# Altium PCB PCB_2019-12-31 00_37_03.pcbdoc
Units mil, origin at the board's own origin, x right, y up, seen from the top; angles counter-clockwise.
Board outline 5600 x 5600 mil, 2 copper layers (Top Layer, Bottom Layer); 48 components, 11 nets, 115 pads, 10 vias.
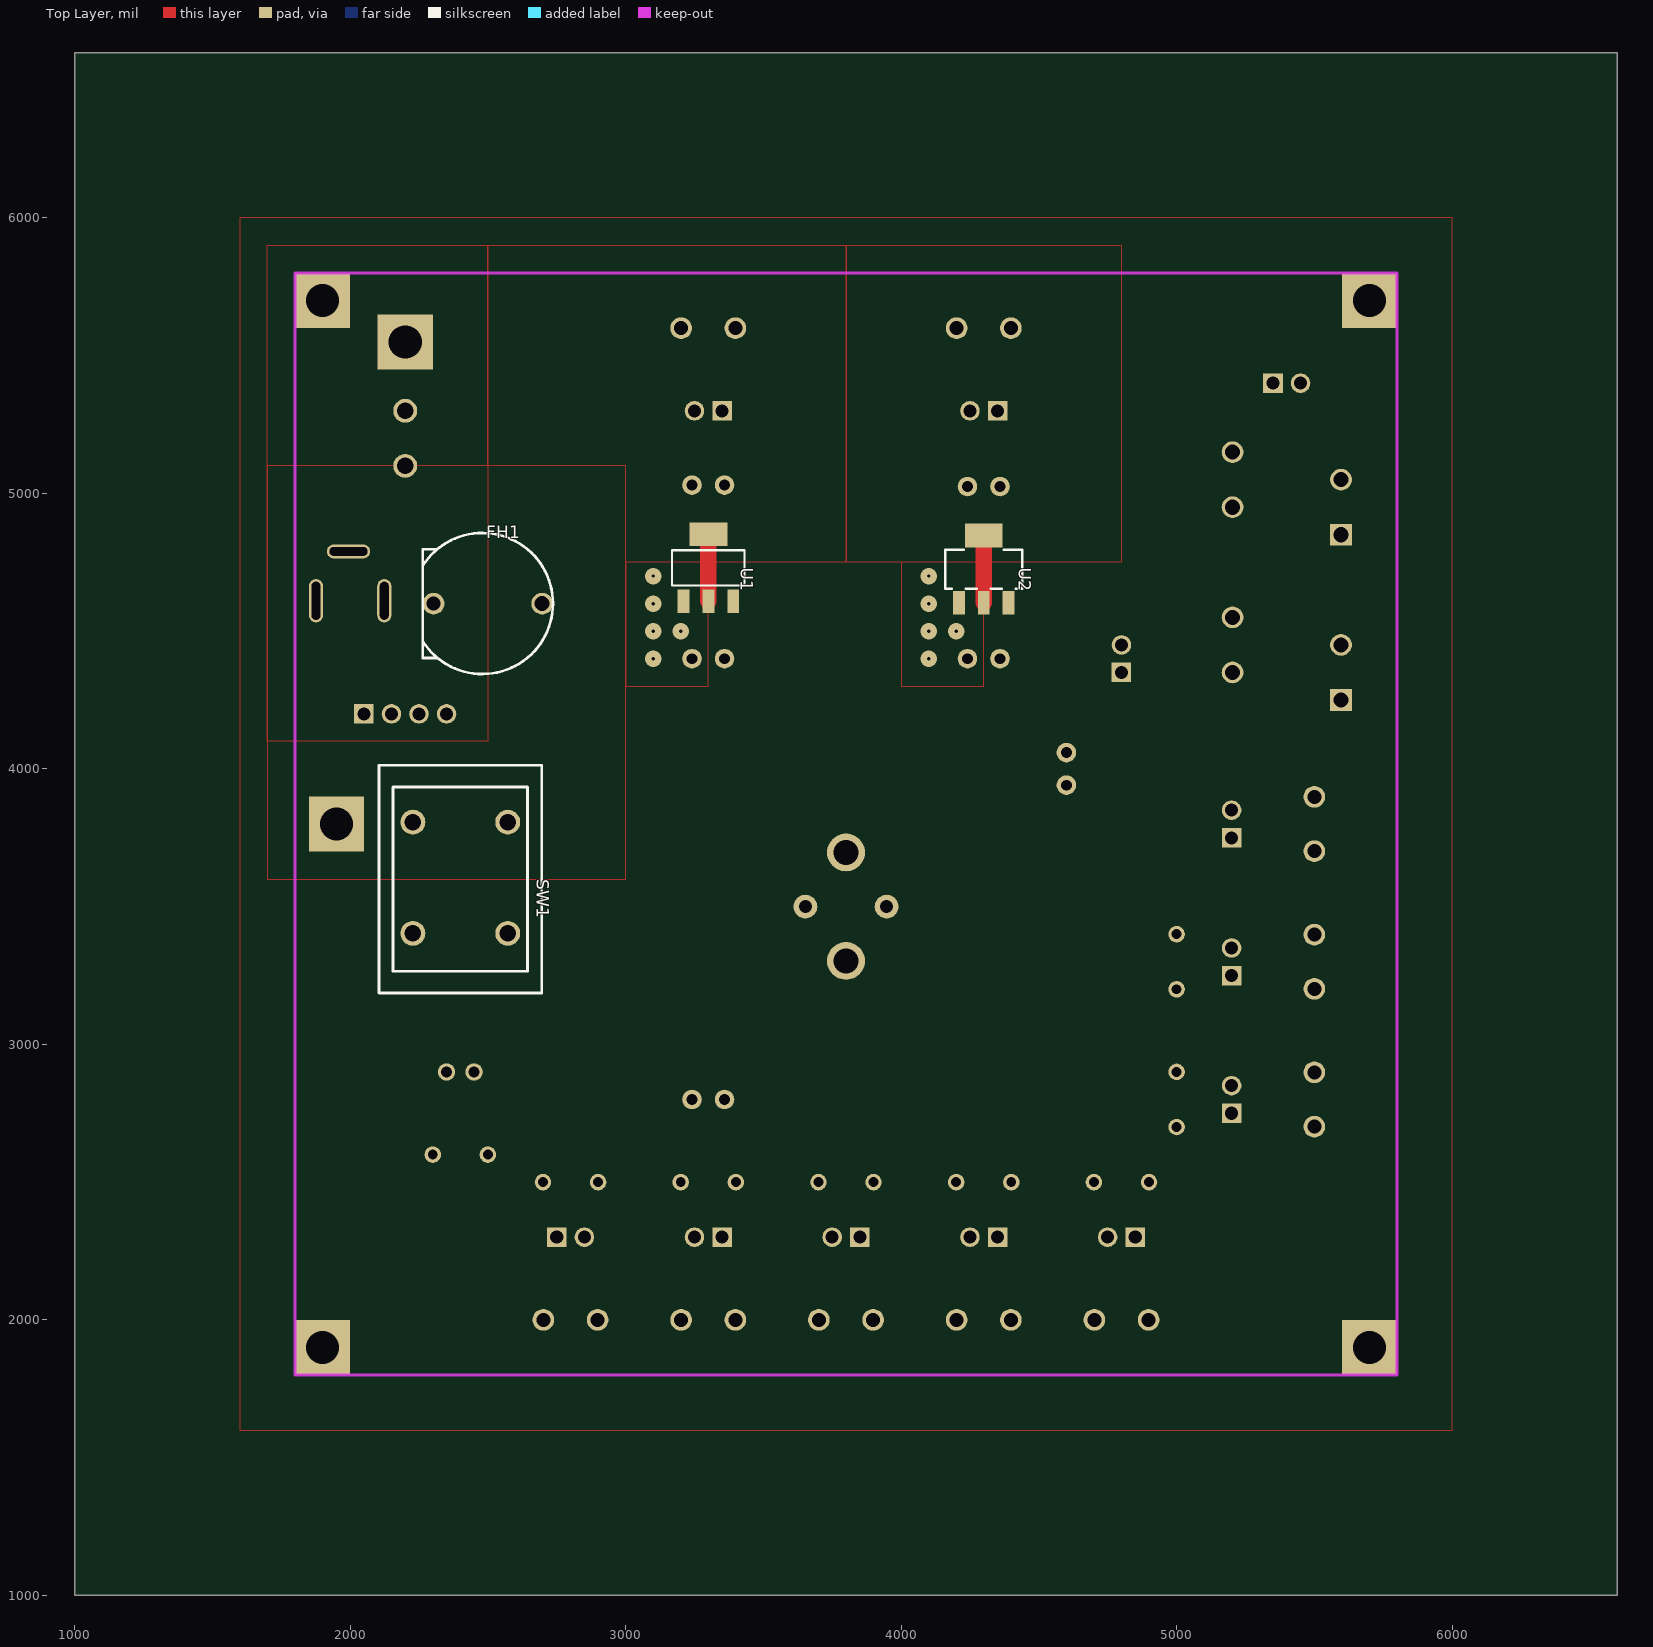
[diagram p0: Top Layer view]
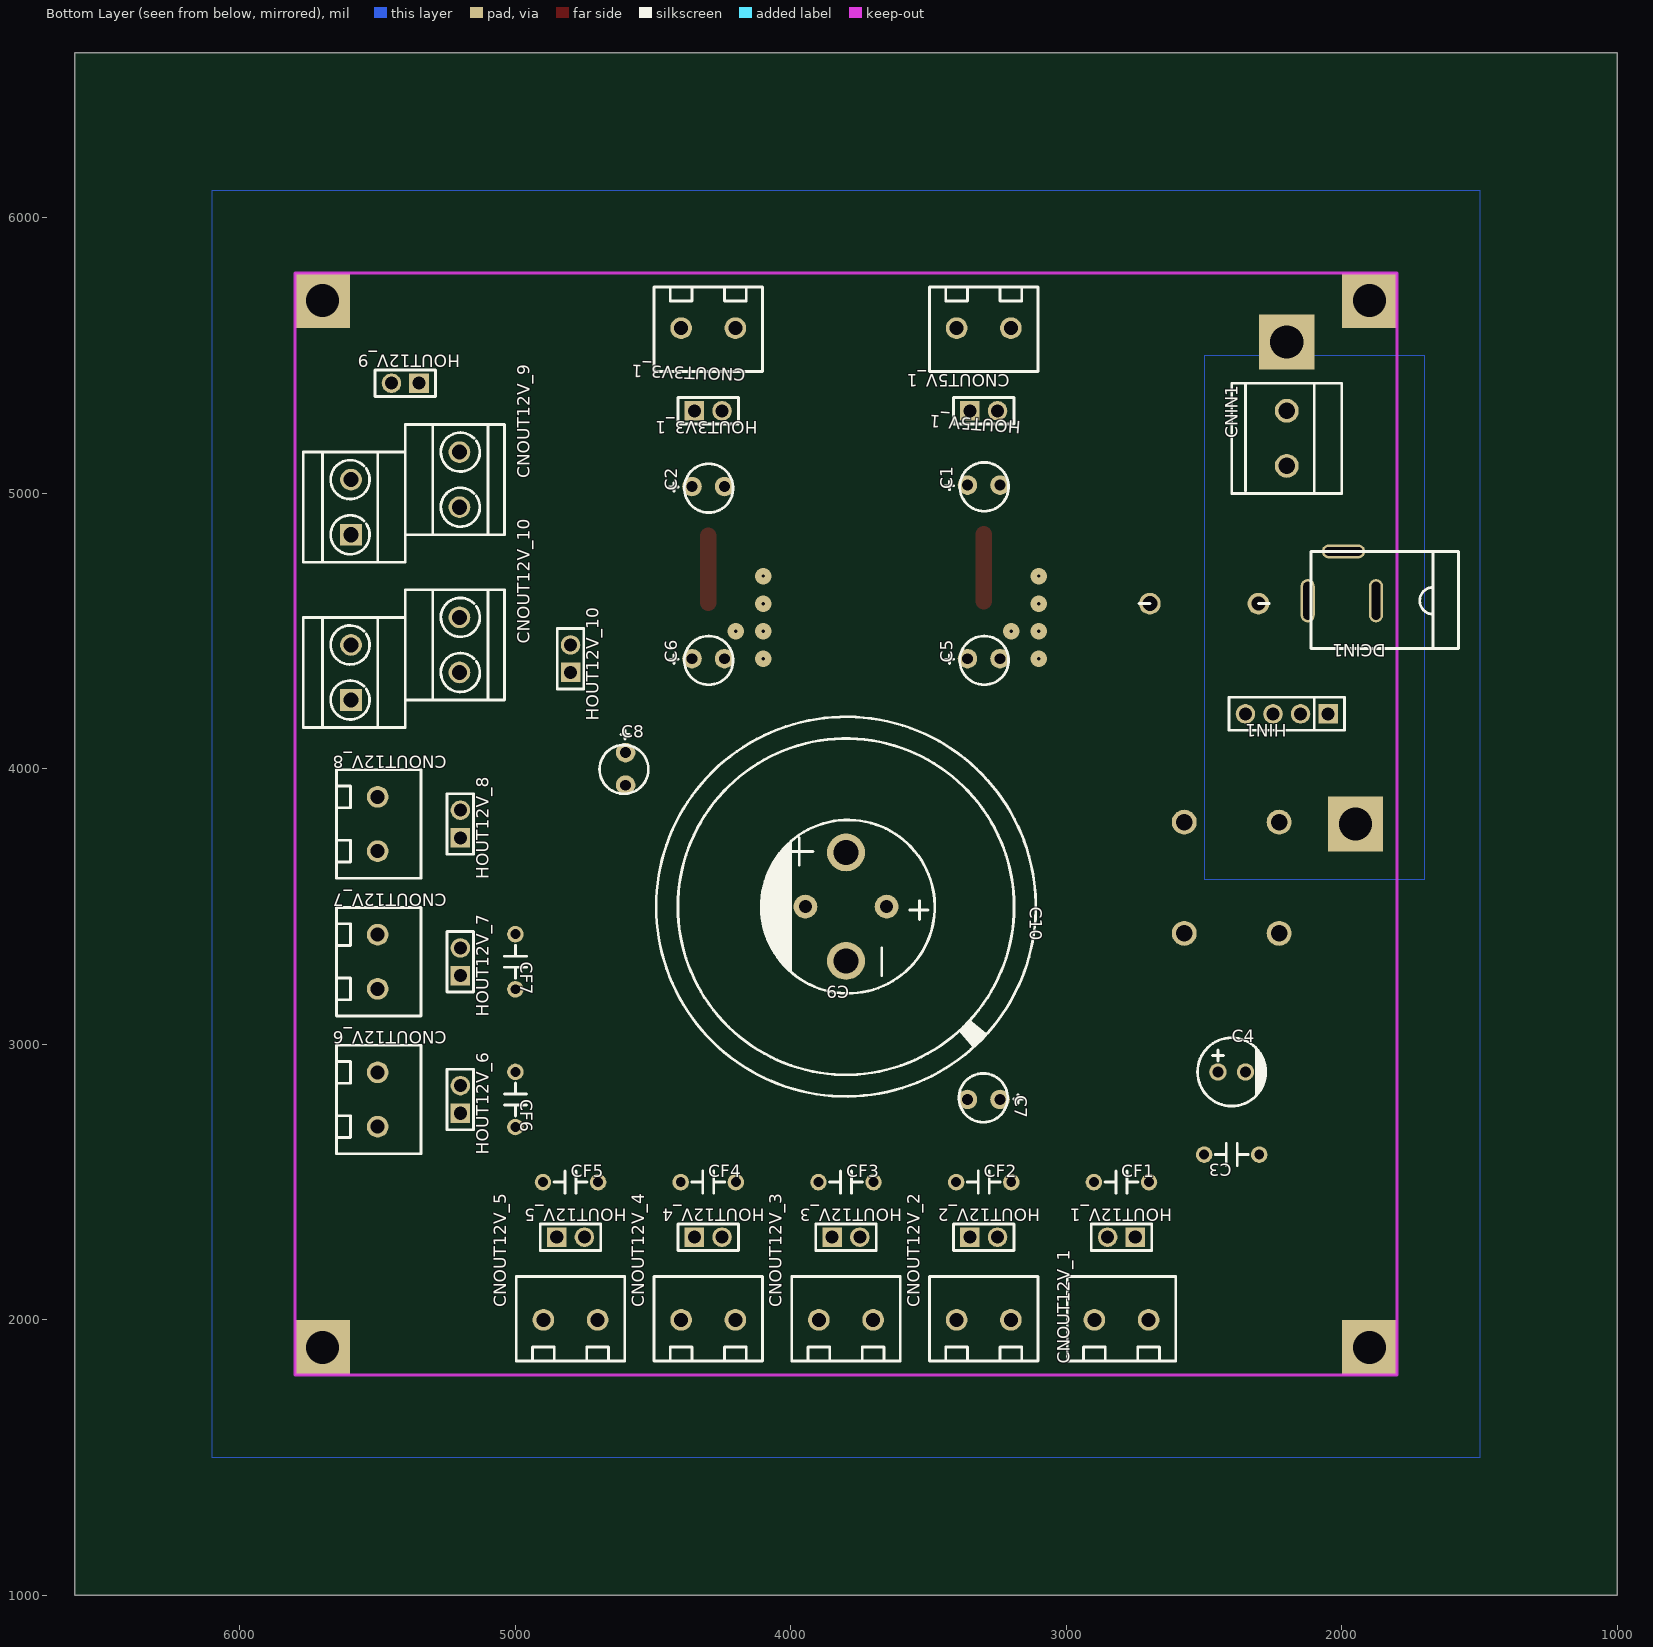
[diagram p1: Bottom Layer view, seen from below]

## Layer stack, top to bottom
Top Layer: signal copper (thickness not stored)
Dielectric: dielectric 12.6, FR-4, Dk 4.8
Bottom Layer: signal copper (thickness not stored)

## Board outline
6600,1000 1000,1000 1000,6600 6600,6600

## Components (designator, comment, footprint, x,y, rotation, side; value= is the part's Value field where it differs from the comment)
C1 "10uF" CAP-TAN-S2.5 3300,5030 r270 bottom
C2 "10uF" CAP-TAN-S2.5 4300,5025 r270 bottom
C3 "2.2uF" CAP-0.2 2400,2600 r180 bottom
C4 "100uF" CAP-TH_BD6.3-P2.50-D1.0-FD 2400,2900 r0 bottom
C5 "10uF" CAP-TAN-S2.5 3300,4400 r270 bottom
C6 "10uF" CAP-TAN-S2.5 4300,4400 r270 bottom
C7 "10uF" CAP-TAN-S2.5 3300,2800 r90 bottom
C8 "10uF" CAP-TAN-S2.5 4600,4000 r0 bottom
C9 "4700uF" CAP-TH_BD16.0-P7.50-D1.2-FD 3800,3500 r180 bottom
C10 "22000uF" CAP-TH_BD35.0-P10.00-D2.3-FD 3800,3500 r90 bottom
CF1 "1uF" CAP-0.2 2800,2500 r0 bottom
CF2 "1uF" CAP-0.2 3300,2500 r0 bottom
CF3 "1uF" CAP-0.2 3800,2500 r0 bottom
CF4 "1uF" CAP-0.2 4300,2500 r0 bottom
CF5 "1uF" CAP-0.2 4800,2500 r0 bottom
CF6 "1uF" CAP-0.2 5000,2800 r90 bottom
CF7 "1uF" CAP-0.2 5000,3300 r90 bottom
CNIN1 "MKDSN1.5/2-5.08" MKDSN1.5/2-5.08 2200,5200 r270 bottom
CNOUT3V3_1 "WJ126V-5.0-2P" WJ126V-5.0-2P 4300,5600 r90 bottom
CNOUT5V_1 "WJ126V-5.0-2P" WJ126V-5.0-2P 3300,5600 r90 bottom
CNOUT12V_1 "WJ126V-5.0-2P" WJ126V-5.0-2P 2800,2000 r270 bottom
CNOUT12V_2 "WJ126V-5.0-2P" WJ126V-5.0-2P 3300,2000 r270 bottom
CNOUT12V_3 "WJ126V-5.0-2P" WJ126V-5.0-2P 3800,2000 r270 bottom
CNOUT12V_4 "WJ126V-5.0-2P" WJ126V-5.0-2P 4300,2000 r270 bottom
CNOUT12V_5 "WJ126V-5.0-2P" WJ126V-5.0-2P 4800,2000 r270 bottom
CNOUT12V_6 "WJ126V-5.0-2P" WJ126V-5.0-2P 5500,2800 r0 bottom
CNOUT12V_7 "WJ126V-5.0-2P" WJ126V-5.0-2P 5500,3300 r0 bottom
CNOUT12V_8 "WJ126V-5.0-2P" WJ126V-5.0-2P 5500,3800 r0 bottom
CNOUT12V_9 "EELK508V-04P" EELK508V-04P 5400,5000 r270 bottom
CNOUT12V_10 "EELK508V-04P" EELK508V-04P 5400,4400 r270 bottom
DCIN1 "DC005-2.0MM" DC-5020 2000,4700 r180 bottom
FH1 "Fuse-holder - C268208" "FUSE-HOLDER- C268208" 2500,4600 r0 top
HIN1 "Header-Male-2.54_1x4" DIP-1X4P-2.54MM-M 2200,4200 r180 bottom
HOUT3V3_1 "MTP125-1102S1" HDR-TH_2P-P2.54-V_A2541HWV-2P 4300,5300 r0 bottom
HOUT5V_1 "MTP125-1102S1" HDR-TH_2P-P2.54-V_A2541HWV-2P 3300,5300 r0 bottom
HOUT12V_1 "MTP125-1102S1" HDR-TH_2P-P2.54-V_A2541HWV-2P 2800,2300 r180 bottom
HOUT12V_2 "MTP125-1102S1" HDR-TH_2P-P2.54-V_A2541HWV-2P 3300,2300 r0 bottom
HOUT12V_3 "MTP125-1102S1" HDR-TH_2P-P2.54-V_A2541HWV-2P 3800,2300 r0 bottom
HOUT12V_4 "MTP125-1102S1" HDR-TH_2P-P2.54-V_A2541HWV-2P 4300,2300 r0 bottom
HOUT12V_5 "MTP125-1102S1" HDR-TH_2P-P2.54-V_A2541HWV-2P 4800,2300 r0 bottom
HOUT12V_6 "MTP125-1102S1" HDR-TH_2P-P2.54-V_A2541HWV-2P 5200,2800 r270 bottom
HOUT12V_7 "MTP125-1102S1" HDR-TH_2P-P2.54-V_A2541HWV-2P 5200,3300 r270 bottom
HOUT12V_8 "MTP125-1102S1" HDR-TH_2P-P2.54-V_A2541HWV-2P 5200,3800 r270 bottom
HOUT12V_9 "MTP125-1102S1" HDR-TH_2P-P2.54-V_A2541HWV-2P 5400,5400 r180 bottom
HOUT12V_10 "MTP125-1102S1" HDR-TH_2P-P2.54-V_A2541HWV-2P 4800,4400 r270 bottom
SW1 "SDDJE33300" SW-TH_4PIN_SDDJE33300 2400,3600 r270 top
U1 "NCP1117ST50T3G" SOT-223_L6.5-W3.5-P2.30-LS7.0-BR 3300,4730 r270 top
U2 "NCP1117ST33T3G" SOT-223-3_L6.5-W3.4-P2.30-LS7.0-BR 4300,4725 r270 top

## Footprints (in the part's own frame and the unit in brackets; to place one, negate y for a bottom-side part, rotate by r counter-clockwise, add the part's x,y. Pads: shape width x height; smd on the part's side, far side on the other; paste and mask are expansions set on the pad)
CAP-0.2 [mil]
  round 60 hole 36: 1(100,0) 2(-100,0)
  silkscreen extent -60,-40 60,40
CAP-TAN-S2.5 [mm]
  round 1.8 hole 1: 1(0,-1.5) 2(0,1.5)
  silkscreen extent -2.1,-3.6 2.4,2.29
CAP-TH_BD6.3-P2.50-D1.0-FD [mm]
  round 1.6 hole 1: 1(1.27,0) 2(-1.27,0)
  silkscreen extent -3.17,-3.15 3.15,3.15
CAP-TH_BD16.0-P7.50-D1.2-FD [mm]
  round 2.2 hole 1.2: 1(3.75,0) 2(-3.75,0)
  silkscreen extent -7.81,-8 8.19,8
CAP-TH_BD35.0-P10.00-D2.3-FD [mm]
  round 3.5 hole 2.3: 1(5,0) 2(-5,0)
  silkscreen extent -17.5,-17.5 17.5,17.5
DC-5020 [mm]
  oval 1.3x3.999 hole 0.8 slot 3.5 at 90 deg: 1(-3.15,-2.275) 2(3.15,-2.275)
  oval 3.999x1.3 hole 0.8 slot 3.5 at 0 deg: 3(0.15,2.275)
  silkscreen extent -2.85,-6.67 10.75,2.28
DIP-1X4P-2.54MM-M [mm]
  rect 1.8x1.8 hole 1.2: 1(3.81,0)
  round 1.8 hole 1.2: 2(1.27,0) 3(-1.27,0) 4(-3.81,0)
  silkscreen extent -5.33,-1.52 5.33,1.52
EELK508V-04P [mm]
  rect 2x2 hole 1.4: 1(3.81,-5)
  round 2 hole 1.4: 2(1.27,5) 3(-1.27,-5) 4(-3.81,5)
  silkscreen extent -6.35,-9.4 6.35,9.14
"FUSE-HOLDER- C268208" [mm]
  round 2 hole 1.3: 1(-5.005,0)
  round 2 hole 1.4: 2(5.005,0)
  silkscreen extent -6.01,-6.49 6,6.51
HDR-TH_2P-P2.54-V_A2541HWV-2P [mm]
  rect 1.8x1.8 hole 1.2: 1(1.27,0)
  round 1.8 hole 1.2: 2(-1.27,0)
  silkscreen extent -2.79,-1.22 2.79,1.22
MKDSN1.5/2-5.08 [mm]
  round 2.2 hole 1.5: 1(2.54,0) 2(-2.54,0)
  silkscreen extent -5.08,-5.08 5.08,5.08
SOT-223-3_L6.5-W3.4-P2.30-LS7.0-BR [mm]
  rect 2.2x1.1 smd: 1(3.099,-2.3) 2(3.099,0) 3(3.099,2.3)
  rect 2.2x3.5 smd: 4(-3.099,0)
  silkscreen extent -1.8,-3.55 1.8,3.55
SOT-223_L6.5-W3.5-P2.30-LS7.0-BR [mil]
  rect 85x43 smd: 1(122,-90.5) 2(122,0.5) 3(122,90.5)
  rect 85x138 smd: 4(-122,0.5)
  silkscreen extent -64,-132 64,132
SW-TH_4PIN_SDDJE33300 [mm]
  round 2.3 hole 1.5: 1(5,-4.375) 2(-5.25,-4.375) 3(5,4.375) 4(-5.25,4.375)
  silkscreen extent -10.5,-7.5 10.5,7.5
WJ126V-5.0-2P [mm]
  round 2 hole 1.3: 1(0,-2.501) 2(0,2.501)
  silkscreen extent -4,-5 3.8,5

## Free pads (board coordinates)
  rect 200x200 hole 120: 1(1900,1900) 1(1900,5700) 1(1950,3800) 1(2200,5550) 1(5700,1900) 1(5700,5700)

## Via types
v1: diameter 60, hole 12, Top Layer to Bottom Layer, 10 vias

## Nets (pads, with @x,y where several pads share a name; then routed paths per layer and width w, separated by ;. In a path a pad name is that pad's centre, name@x,y a point inside that pad or via, vN(x,y) a via of type N, cw(c..) or ccw(c..) an arc to the next point about the centre after c; other vN are vias at no path point)
+3V3: C2.1 CNOUT3V3_1.2 HOUT3V3_1.1 U2.2 U2.4 | length 244
  Top Layer w60: U2.2 U2.4
+5V: C1.1 CNOUT5V_1.2 HOUT5V_1.1 U1.2 U1.4 | length 244
  Top Layer w60: U1.2 U1.4
GND: C1.2 C2.2 C3.1 C4.2 C5.2 C6.2 C7.2 C8.2 C9.2 C10.2 CF1.1 CF2.1 CF3.1 CF4.1 CF5.1 CF6.1 CF7.1 CNOUT3V3_1.1 CNOUT5V_1.1 CNOUT12V_1.1 CNOUT12V_2.1 CNOUT12V_3.1 CNOUT12V_4.1 CNOUT12V_5.1 CNOUT12V_6.1 CNOUT12V_7.1 CNOUT12V_8.1 CNOUT12V_9.3 CNOUT12V_9.4 CNOUT12V_10.3 CNOUT12V_10.4 HOUT3V3_1.2 HOUT5V_1.2 HOUT12V_1.2 HOUT12V_2.2 HOUT12V_3.2 HOUT12V_4.2 HOUT12V_5.2 HOUT12V_6.2 HOUT12V_7.2 HOUT12V_8.2 HOUT12V_9.2 HOUT12V_10.2 pad.1@1900,1900 pad.1@1900,5700 pad.1@5700,1900 pad.1@5700,5700 SW1.1 U1.1 U2.1
  other v1: 3100,4400 4100,4400 3100,4500 3200,4500 4100,4500 4200,4500 3100,4600 4100,4600 3100,4700 4100,4700
S$15: 
S$17: 
S$46: 
S$48: 
VCC: C3.2 C4.1 C5.1 C6.1 C7.1 C8.1 C9.1 C10.1 CF1.2 CF2.2 CF3.2 CF4.2 CF5.2 CF6.2 CF7.2 CNOUT12V_1.2 CNOUT12V_2.2 CNOUT12V_3.2 CNOUT12V_4.2 CNOUT12V_5.2 CNOUT12V_6.2 CNOUT12V_7.2 CNOUT12V_8.2 CNOUT12V_9.1 CNOUT12V_9.2 CNOUT12V_10.1 CNOUT12V_10.2 HOUT12V_1.1 HOUT12V_2.1 HOUT12V_3.1 HOUT12V_4.1 HOUT12V_5.1 HOUT12V_6.1 HOUT12V_7.1 HOUT12V_8.1 HOUT12V_9.1 HOUT12V_10.1 SW1.3 U1.3 U2.3
VFH: FH1.2 SW1.4
VIN+: CNIN1.2 DCIN1.1 FH1.1 HIN1.3 HIN1.4 pad.1@2200,5550
VIN-: CNIN1.1 DCIN1.2 DCIN1.3 HIN1.1 HIN1.2 pad.1@1950,3800 SW1.2

## Polygon pours and split planes (outlines as drawn)
GND on Bottom Layer (solid): 1500,6100 1500,1500 6100,1500 6100,6100
VIN- on Bottom Layer (solid): 1700,5500 2500,5500 2500,3600 1700,3600
VCC on Top Layer (solid): 1600,6000 1600,1600 6000,1600 6000,6000
GND on Top Layer (solid): 4000,4750 4000,4300 4300,4300 4300,4750
GND on Top Layer (solid): 3000,4750 3000,4300 3300,4300 3300,4750
+3V3 on Top Layer (solid): 3800,5900 4800,5900 4800,4750 3800,4750
VIN+ on Top Layer (solid): 1700,5900 2500,5900 2500,4100 1700,4100
VFH on Top Layer (solid): 1700,4100 1700,3600 3000,3600 3000,5100 1700,5100
+5V on Top Layer (solid): 2500,5100 2500,5900 3800,5900 3800,4750 3000,4750 3000,5100 2500,5100

## Silkscreen, mask and mechanical layers (free items; w line width, h text height)
Document:
  lines w0.1: 3799,3799 3801,3801